# Altium PCB backup.PcbDoc (part 1 of 3)
Units mm, origin at the board's own origin, x right, y up, seen from the top; angles counter-clockwise.
Board outline 28.94 x 32.03 mm, 4 copper layers (Top Layer, Inner Layer 1, Inner Layer 2, Bottom Layer), stack 1.586 mm thick; 135 components, 83 nets, 442 pads, 355 vias.
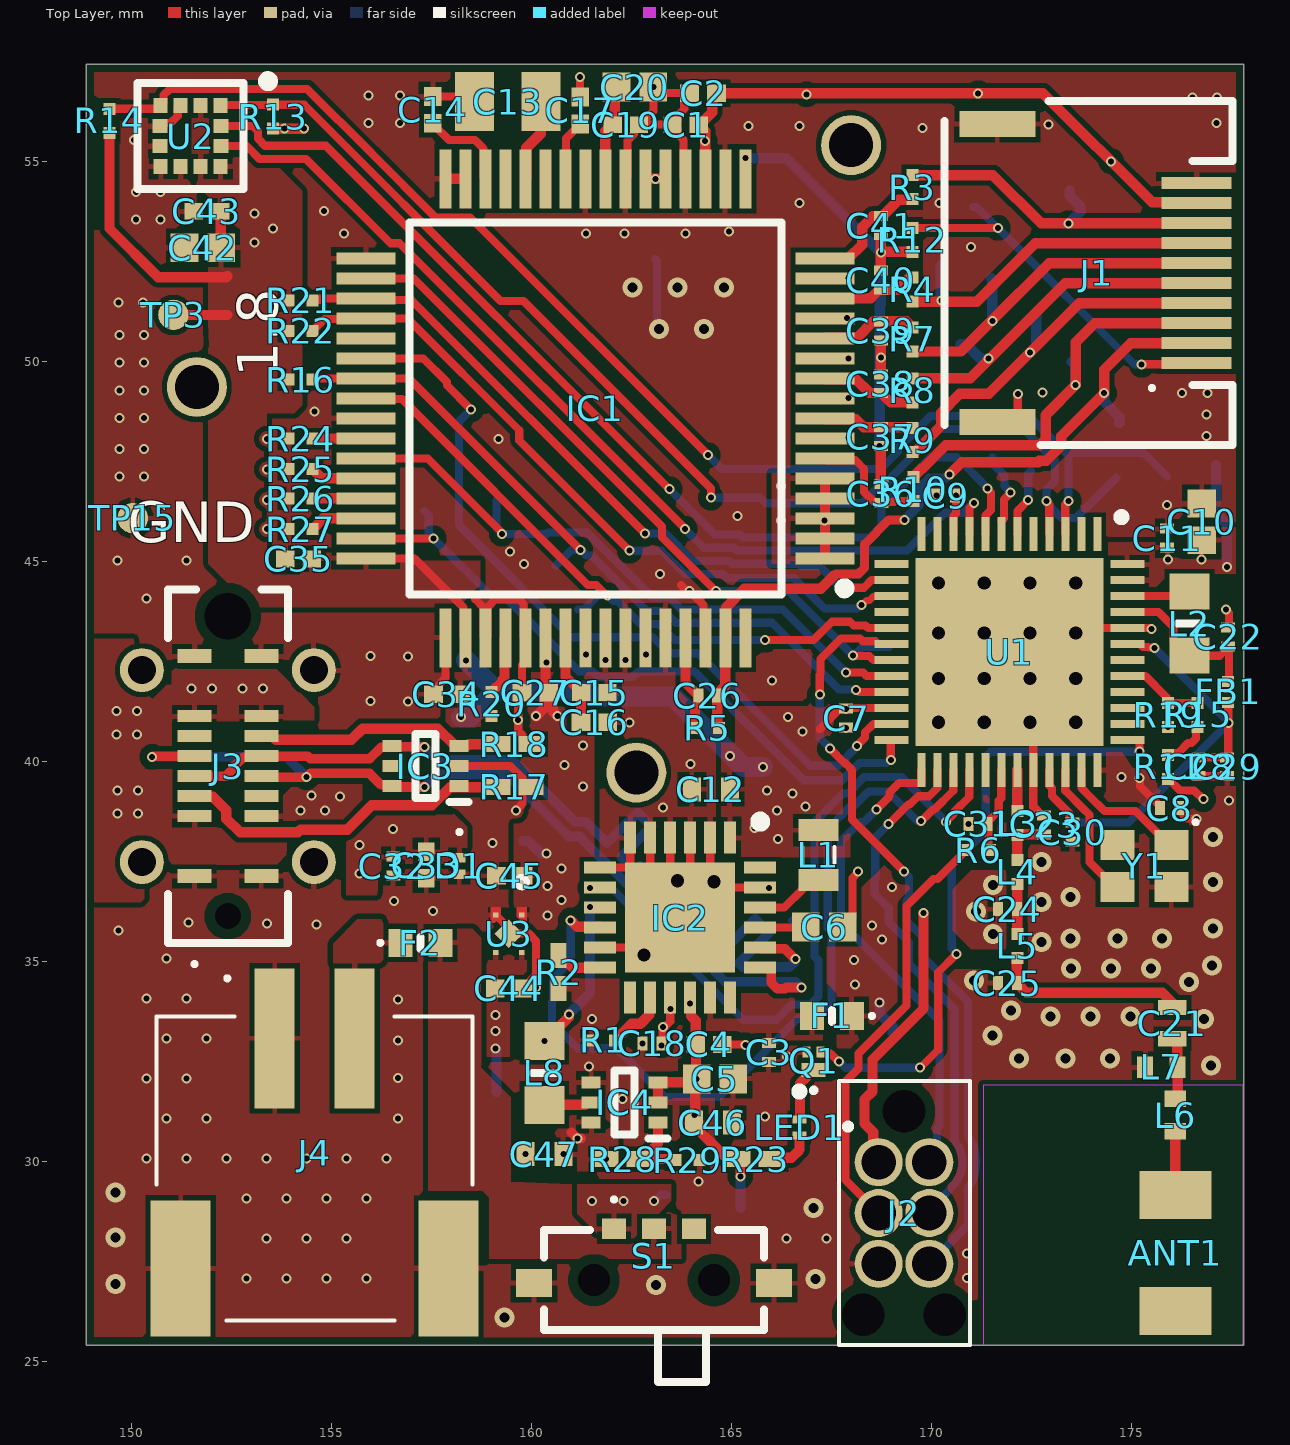
[diagram p0: Top Layer view]
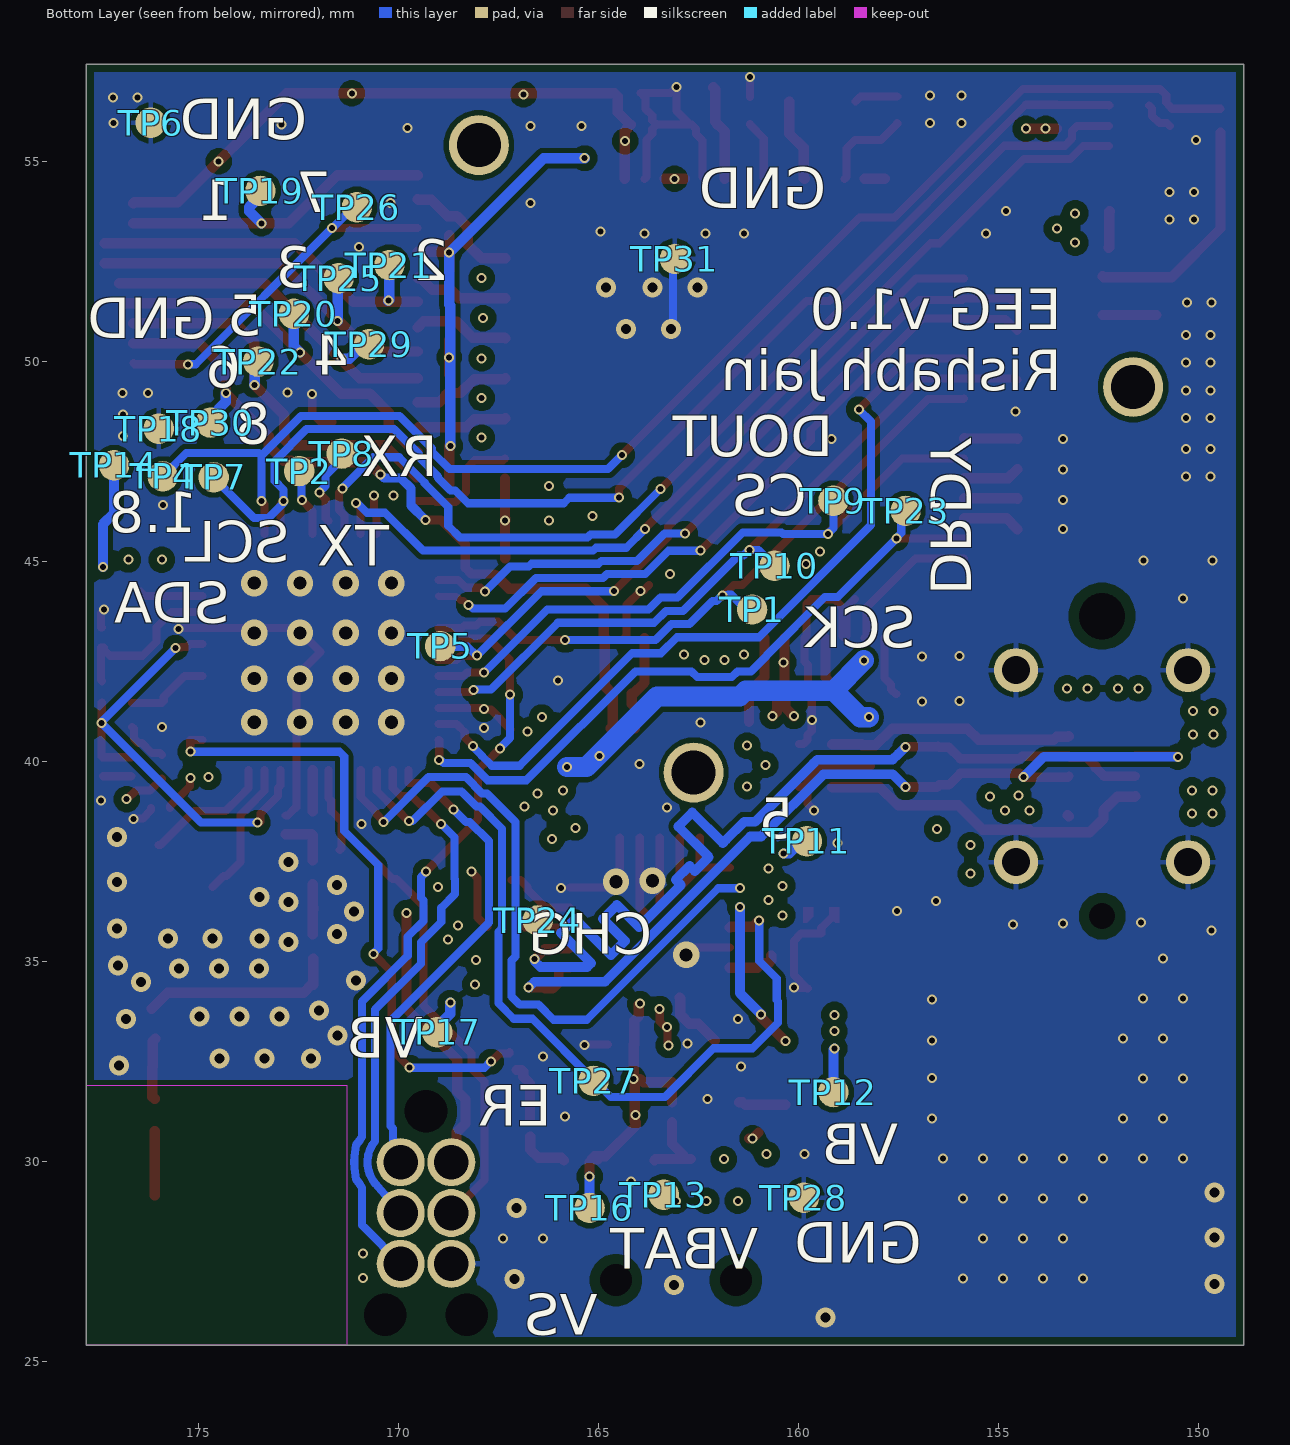
[diagram p1: Bottom Layer view, seen from below]
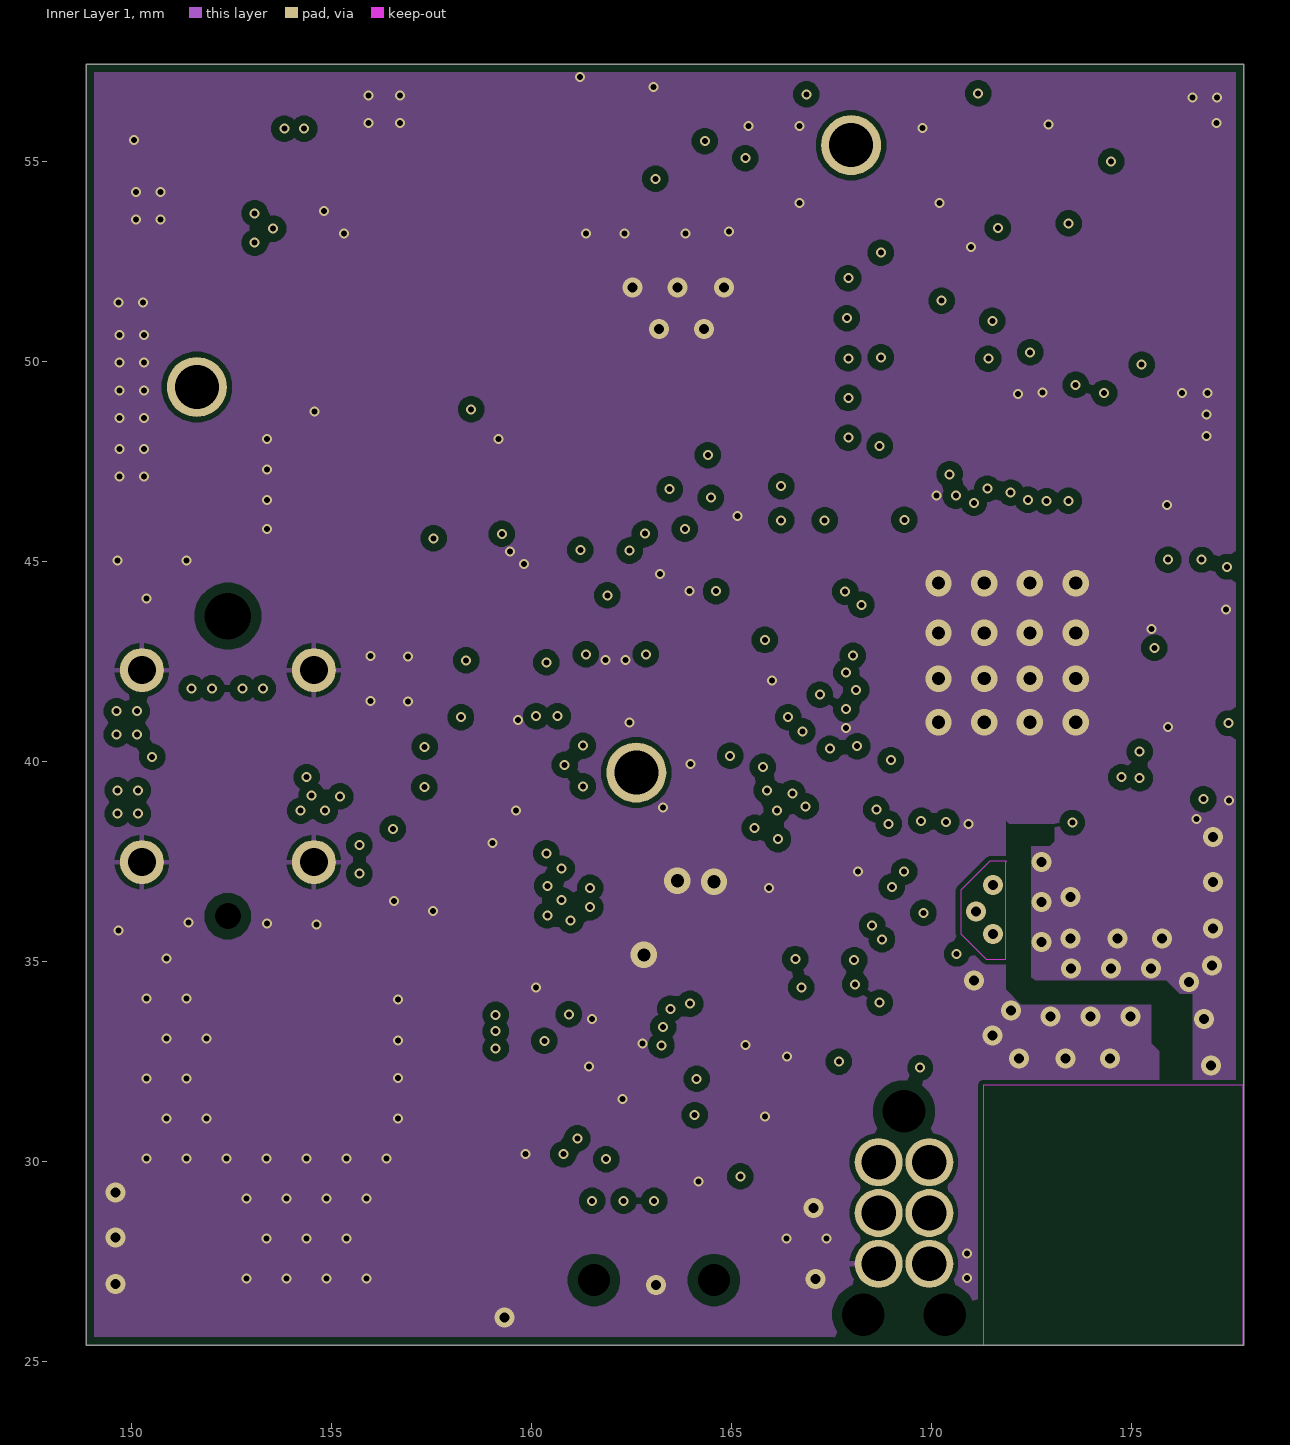
[diagram p2: Inner Layer 1]
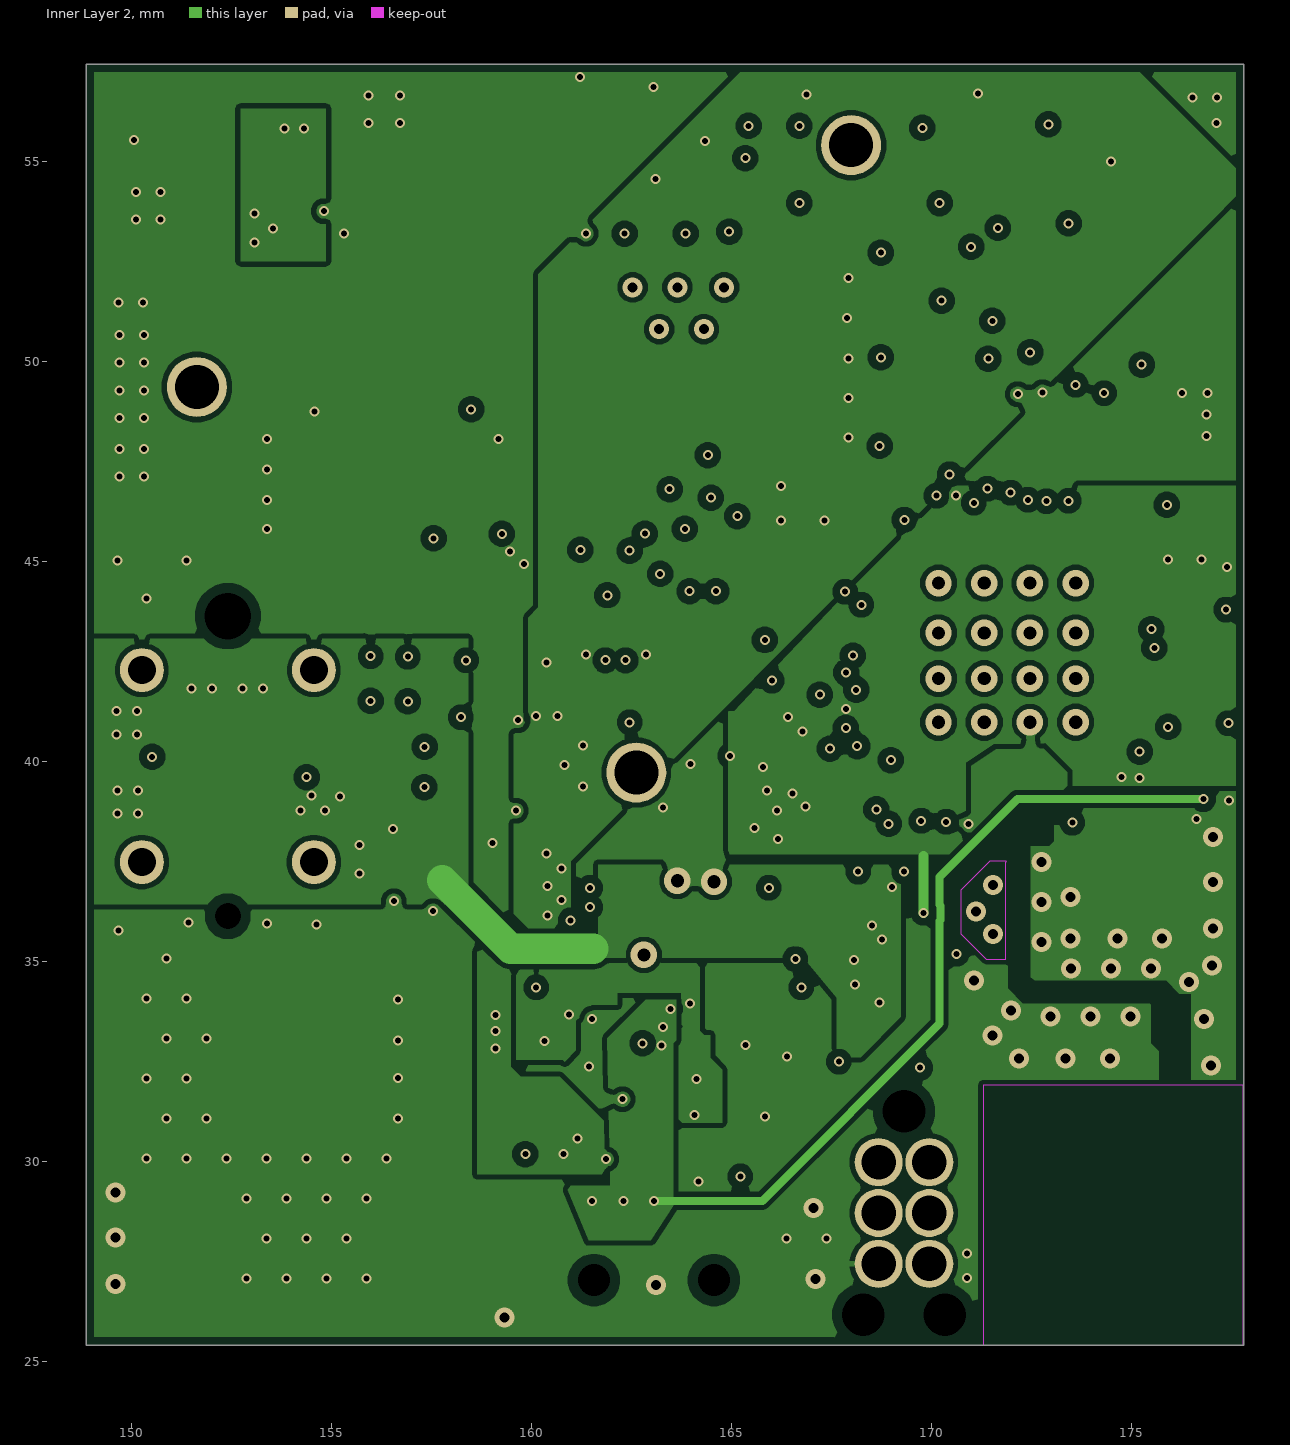
[diagram p3: Inner Layer 2]
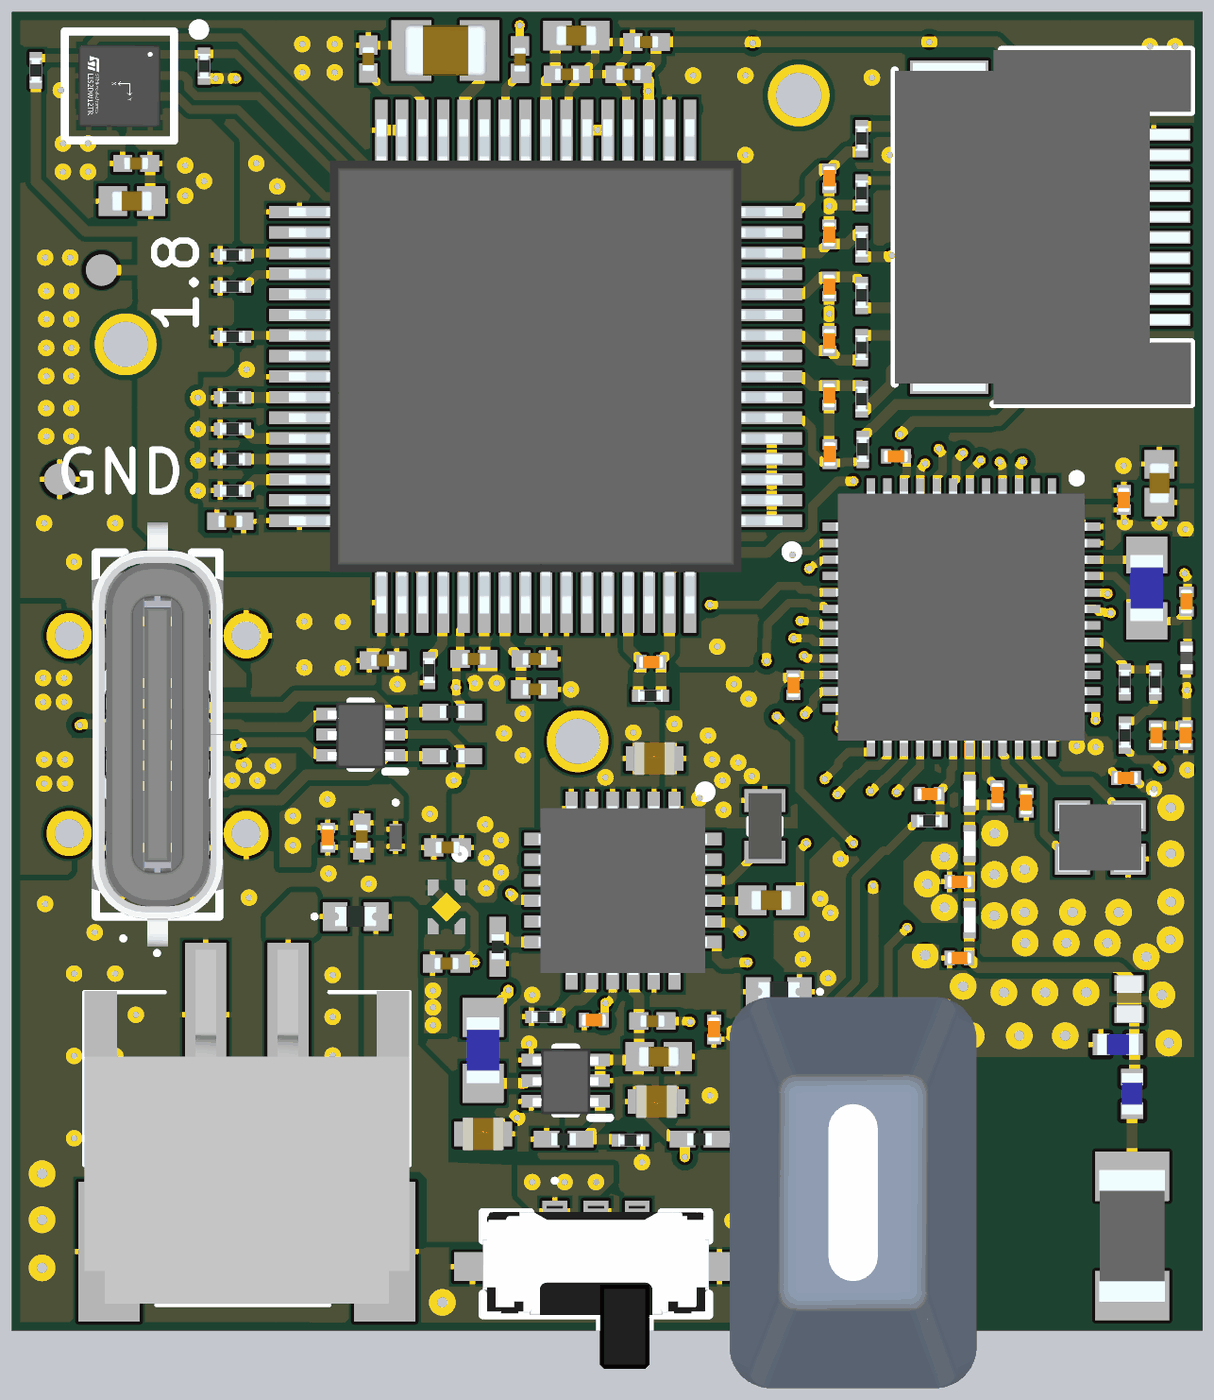
[diagram p5: 3D render of the assembled board from above, using the file's embedded part models]

## Layer stack, top to bottom
Top Solder: solder mask 0.0102, Solder Resist, Dk 3.8
Top Layer: signal copper 0.035
Dielectric 2: prepreg 0.2104, PP-006, Dk 4.4
Inner Layer 1: signal copper 0.0152
Dielectric 1: dielectric 1.065, FR-4, Dk 4.6
Inner Layer 2: signal copper 0.0152
Dielectric 3: prepreg 0.2104, PP-006, Dk 4.4
Bottom Layer: signal copper 0.035
Bottom Solder: solder mask 0.0102, Solder Resist, Dk 3.8

## Board outline
148.869,25.4 177.802,25.4 177.814,25.393 177.814,57.425 148.869,57.425

## Design rules (kind name [scope] priority, off if disabled: settings)
BoardOutlineClearance [All] p1: gap=0.2 ignorepadtopadclearanceinfootprint=FALSE
Clearance [All] p1: gap=0.127 ignorepadtopadclearanceinfootprint=FALSE except(0.25: Arc-Hole Track-Hole SMDPad-Hole THPad-Hole Via-Hole Fill-Hole Poly-Hole Region-Hole Text-Hole)
ComponentClearance [All] p1: gap=0.127 collisioncheckmode=3 verticalgap=0.127 showdistances=TRUE
DiffPairsRouting DiffPair_DiffPairsRouting [InDifferentialPair ('D')] p1: maxlimit=0.127 minlimit=0.127 mostfreqgap=0.127 toplayer_minwidth=0.24 toplayer_maxwidth=0.24 toplayer_prefwidth=0.24 midlayer1_minwidth=0.154 midlayer1_maxwidth=0.154 midlayer1_prefwidth=0.154 midlayer2_minwidth=0.154 midlayer2_maxwidth=0.154 midlayer2_prefwidth=0.154 bottomlayer_minwidth=0.24 bottomlayer_maxwidth=0.24 bottomlayer_prefwidth=0.24 impedanceprofiledriven=TRUE impedanceprofileid={78E9D437-D7EC-4C68-8FFD-46783BA93913} impedanceprofilevalue=90.000000 maxuncoupledlength=12.7
DiffPairsRouting DiffPairsRouting_1 [All] p2: maxlimit=0.254 minlimit=0.254 mostfreqgap=0.254 toplayer_minwidth=0.381 toplayer_maxwidth=0.381 toplayer_prefwidth=0.381 midlayer1_minwidth=0.381 midlayer1_maxwidth=0.381 midlayer1_prefwidth=0.381 midlayer2_minwidth=0.381 midlayer2_maxwidth=0.381 midlayer2_prefwidth=0.381 bottomlayer_minwidth=0.381 bottomlayer_maxwidth=0.381 bottomlayer_prefwidth=0.381 maxuncoupledlength=12.7
DiffPairsRouting [InDifferentialPairClass('All Differential Pairs')] p3: maxlimit=0.127 minlimit=0.127 mostfreqgap=0.127 toplayer_minwidth=0.24 toplayer_maxwidth=0.24 toplayer_prefwidth=0.24 midlayer1_minwidth=0.154 midlayer1_maxwidth=0.154 midlayer1_prefwidth=0.154 midlayer2_minwidth=0.154 midlayer2_maxwidth=0.154 midlayer2_prefwidth=0.154 bottomlayer_minwidth=0.24 bottomlayer_maxwidth=0.24 bottomlayer_prefwidth=0.24 impedanceprofiledriven=TRUE impedanceprofileid={78E9D437-D7EC-4C68-8FFD-46783BA93913} impedanceprofilevalue=90.000000 maxuncoupledlength=12.7
Height [All] p1: minheight=0 maxheight=1816.048 prefheight=12.7
HoleSize [All] p1: absolutevalues=TRUE maxlimit=6.3 minlimit=0.15 maxpercent=80.000 minpercent=20.000
HoleToHoleClearance [All] p1: gap=0.25 allowstackedmicrovias=FALSE
MatchedLengths DiffPair_MatchedLengths [InDifferentialPair ('D')] p1: tolerance=2.54 checknetsindiffpair=FALSE checkdiffpairvsdiffpair=TRUE checkxsignals=TRUE checkothers=TRUE
MinimumAnnularRing [All] p1: minimumring=0.05
MinimumSolderMaskSliver [All] p1: minsoldermaskwidth=0
PlaneClearance [All] p1: clearance=0.127
PlaneConnect PlaneConnectPowerPads [InPadClass('PowerPads')] p1: planeconnectstyle=Direct reliefexpansion=0.508 reliefentries=4 reliefconductorwidth=0.254 reliefairgap=0.254
PlaneConnect [All] p2: pad.planeconnectstyle=Relief pad.reliefexpansion=0.3 pad.reliefentries=4 pad.reliefconductorwidth=0.127 pad.reliefairgap=0.127 via.planeconnectstyle=Direct via.reliefexpansion=0.3 via.reliefentries=4 via.reliefconductorwidth=0.127 via.reliefairgap=0.127
PolygonConnect PolygonConnectPowerPads [All vs (InPadClass('PowerPads'))] p1: connectstyle=Direct reliefconductorwidth=0.254 reliefentries=4 polygonreliefangle="90 Angle" airgapwidth=0.254
PolygonConnect [All] p2: thpad.connectstyle=Relief thpad.reliefconductorwidth=0.127 thpad.reliefentries=4 thpad.polygonreliefangle="90 Angle" thpad.airgapwidth=0.127 smdpad.connectstyle=Relief smdpad.reliefconductorwidth=0.127 smdpad.reliefentries=4 smdpad.polygonreliefangle="90 Angle" smdpad.airgapwidth=0.127 via.connectstyle=Direct via.reliefconductorwidth=0.127 via.reliefentries=4 via.polygonreliefangle="90 Angle" via.airgapwidth=0.127
RoutingVias [All] p1: holewidth=0.15 width=0.25 viastyle="Through Hole" minholewidth=0.15 minwidth=0.25 maxholewidth=0.6 maxwidth=6.6
SilkToSilkClearance [All] p1: silktosilkclearance=0
SilkToSolderMaskClearance [IsPad] p1: minsilkscreentomaskgap=0.127 clearancetoexposedcopper=TRUE
SolderMaskExpansion [All] p1: expansion=0.075 istentingtop=FALSE
SupplyNets "Schematic Supply Nets_8" [InNet('VBAT')] p1: voltage=0.000
SupplyNets "Schematic Supply Nets_7" [InNet('+5V')] p2: voltage=0.000
SupplyNets "Schematic Supply Nets_6" [InNet('VBOOST')] p3: voltage=0.000
SupplyNets "Schematic Supply Nets_5" [InNet('VBAT_PRE')] p4: voltage=0.000
SupplyNets "Schematic Supply Nets_4" [InNet('GND')] p5: voltage=0.000
SupplyNets "Schematic Supply Nets_3" [InNet('+1.8V')] p6: voltage=0.000
SupplyNets "Schematic Supply Nets_2" [InNet('VBUS_PRE')] p7: voltage=0.000
SupplyNets "Schematic Supply Nets_1" [InNet('VSYS')] p8: voltage=0.000
SupplyNets "Schematic Supply Nets" [InNet('VBUS')] p9: voltage=0.000
Width Width_1 [All] p1: maxlimit=2.54 minlimit=0.089 preferedwidth=0.203 toplayer_minwidth=0.102 bottomlayer_minwidth=0.102 minimp=50.000000 maximp=50.000000 favimp=50.000000
Width [InNetClass('RF')] p2: maxlimit=0.262 minlimit=0.181 preferedwidth=0.262 toplayer_minwidth=0.262 midlayer1_maxwidth=0.181 midlayer1_prefwidth=0.181 midlayer2_maxwidth=0.181 midlayer2_prefwidth=0.181 bottomlayer_minwidth=0.262 impedanceprofiledriven=TRUE impedanceprofileid={72D798CF-88A4-4D94-A1B3-ABAB883C5A2B} impedanceprofilevalue=50.000000 minimp=50.000000 maximp=50.000000 favimp=50.000000
20 further rules are at their usual default settings.

## Classes and differential pairs
differential pair class USB: D
net class USB: D_N D_P
net class RF: NetANT1_1 NetC21_1 NetC23_2 NetC24_2 NetL3_1 RF
differential pair D: +D_P -D_N

## Components (designator, comment, footprint, x,y, rotation, side; value= is the part's Value field where it differs from the comment)
ANT1 "2450AT18B100" ANTC3216X140N 176.1,27.7 r270 top
C1 "GRM033R6YA104KE14D" CAPC0603X33N 163.861,55.91 r180 top
C2 "CL03A105MO3NRNH" CAPC0603X39N 164.293,56.698 r180 top
C3 "GRM035R61C225ME01D" GRM033D70J224ME01D 165.938,32.715 r270 top
C4 "GRM033R6YA104KE14D" CAPC0603X33N 164.44,32.918 r0 top
C5 "CL05A106MQ5NUNC" CAPC1005X70N 164.592,32.055 r0 top
C6 "CL05A106MQ5NUNC" CAPC1005X70N 167.325,35.85 r0 top
C7 "GRM033R6YA104KE14D" 0201_GENERIC_CAP 167.869,41.072 r270 top value=100nF
C8 "GRM033R6YA104KE14D" 0201_GENERIC_CAP 175.95,38.825 r0 top value=100nF
C9 "GRM033R6YA104KE14D" 0201_GENERIC_CAP 170.358,46.634 r180 top value=100nF
C10 "CL05A106MQ5NUNC" 0402_GENERIC_CAP 176.76,45.98 r270 top value=10µF
C11 "GRM033R6YA104KE14D" 0201_GENERIC_CAP 175.897,45.573 r90 top value=100nF
C12 "GRM158R61A226ME15D" GRM15X 164.49,39.294 r0 top
C13 "CL21A107MQYNNWE" CAPC2012X145N 159.41,56.49 r180 top
C14 "CL03A105MO3NRNH" CAPC0603X39N 157.536,56.28 r90 top
C15 "GRM033R6YA104KE14D" CAPC0603X33N 161.575,41.712 r0 top
C16 "CL03A105MO3NRNH" CAPC0603X39N 161.575,40.975 r0 top
C17 "CL03A105MO3NRNH" CAPC0603X39N 161.219,56.266 r90 top
C18 "GRM035R61C225ME01D" GRM033D70J224ME01D 163.017,32.944 r180 top
C19 "GRM033R6YA104KE14D" CAPC0603X33N 162.362,55.91 r0 top
C20 "CL05A106MQ5NUNC" CAPC1005X70N 162.591,56.85 r0 top
C21 "500R07S1R2BV4T" CAP_500R07S1R2BV4T_JOT 176.025,33.45 r90 top
C22 "GRM035R61C225ME01D" 0201_GENERIC_CAP 177.419,43.104 r270 top value=2.2µF
C23 "GJM0335C1E1R5WB01" 0201_GENERIC_CAP 172.822,38.405 r270 top value=1.5pF
C24 "GJM0335C1E2R0WB01" 0201_GENERIC_CAP 171.9,36.3 r0 top value=2.0pF
C25 "GJM0335C1HR30WB01D" 0201_GENERIC_CAP 171.9,34.45 r0 top value=0.3pF
C26 "GRM0335C1H102GE01D" GRM033D70J224ME01D 164.411,41.635 r180 top
C27 "CL03A105MO3NRNH" CAPC0603X39N 160.102,41.712 r180 top
C28 "GRM035R61C225ME01D" 0201_GENERIC_CAP 176.684,39.858 r90 top value=2.2µF
C29 "GRM033R70J103KA01D" 0201_GENERIC_CAP 177.395,39.858 r90 top value=10nF
C30 "GRM033R71A222KA01D" 0201_GENERIC_CAP 173.525,38.225 r90 top value=2.2nF
C31 "GRM0335C1H221FA01D" 0201_GENERIC_CAP 171.171,38.43 r0 top value=3.9pF
C32 "GRM035R61C225ME01D" GRM033D70J224ME01D 156.55,37.375 r270 top
C33 "GRM033R6YA104KE14D" CAPC0603X33N 157.375,37.4 r270 top
C34 "CL03A105MO3NRNH" CAPC0603X39N 157.892,41.675 r180 top
C35 "GRM033R6YA104KE14D" CAPC0603X33N 154.183,45.054 r180 top
C36 "GRM0335C1H221FA01D" GRM033D70J224ME01D 168.75,46.688 r270 top
C37 "GRM0335C1H221FA01D" GRM033D70J224ME01D 168.738,48.112 r90 top
C38 "GRM0335C1H221FA01D" GRM033D70J224ME01D 168.738,49.433 r270 top
C39 "GRM0335C1H221FA01D" GRM033D70J224ME01D 168.738,50.754 r90 top
C40 "GRM0335C1H221FA01D" GRM033D70J224ME01D 168.738,52.024 r270 top
C41 "GRM0335C1H221FA01D" GRM033D70J224ME01D 168.738,53.387 r90 top
C42 "CL05A106MQ5NUNC" CAPC1005X70N 151.79,52.832 r180 top
C43 "GRM033R6YA104KE14D" CAPC0603X33N 151.892,53.746 r180 top
C44 "CL03A105MO3NRNH" CAPC0603X39N 159.436,34.315 r0 top
C45 "CL03A105MO3NRNH" CAPC0603X39N 159.461,37.135 r180 top
C46 "GRM158R61A226ME15D" GRM15X 164.541,30.963 r180 top
C47 "GRM158R61A226ME15D" GRM15X 160.325,30.175 r0 top
D1 "ESDALC8-1BF4" ESDALC81BF4 158.2,37.375 r270 top
F1 "0402L050SL" 0402L010SLKR 167.513,33.63 r180 top
F2 "0402L050SL" 0402L010SLKR 157.226,35.458 r0 top
FB1 "BLM03AX121SN1D" BLM03AX121SN1D 177.419,41.732 r270 top value=120R/0.2A
IC1 "ADS1299IPAG" QFP50P1200X1200X120-64N 161.603,48.818 r180 top
IC2 "NPM1100-QDAA-R7" QFN50P400X400X90-25N-D 163.723,36.087 r270 top
IC3 "TPD4E1B06DRLR" SOTFL50P160X60-6N 157.35,39.875 r180 top
IC4 "TPS61023DRLR" SOTFL50P160X60-6N 162.331,31.471 r180 top
J1 "10FHH-SM1-GAN-TF_LF__SN_" 10FHHSM1GANTFLFSN 173.93,52.2 r90 top
J2 "TC2030-MCP" TC2030MCP 168.681,29.972 r270 top
J3 "GT-USB-7055BB" GTUSB7055BB 152.415,39.875 r90 top
J4 "S2B-PH-SM4-TB_LF__SN_" S2BPHSM4TBLFSN 154.584,29.82 r180 top
L1 "MBKK1608T2R2M" MBKK1608T1R0M 167.175,37.65 r270 top
L2 "MLZ1608M4R7WT000" MLZ1608M4R7WT000 176.454,43.434 r270 top value=4.7µH
L3 "LQP03HQ2N7B02" LQP03HQ2N7B02 172.15,38.45 r270 top value=2.7nH
L4 "LQP03HQ3N5B02" LQP03HQ2N7B02 172.15,37.225 r270 top value=3.5nH
L5 "LQP03HQ3N5B02" LQP03HQ2N7B02 172.15,35.375 r270 top value=3.5nH
L6 "L-07C3N3SV6T" INDC1005X60N 176.1,31.15 r270 top
L7 "L-07C2N7SV6T" INDC1005X60N 175.75,32.35 r0 top
L8 "DFE18SAN1R0MG0L" INDC1608X100N 160.325,32.207 r90 top
LED1 "APG0603SEC-E-TT" APG0603SECETT 166.7,30.839 r270 top
Q1 "DMN31D5UFZ-7B" X2-DFN0606-3 167.056,32.436 r270 top
R1 "ERA1AEB103C" ERA1A_(0201) 161.798,33.02 r0 top
R2 "RC0201FR-071K8L" RESC0603X26N 160.68,34.722 r270 top
R3 "ERA1AEB103C" ERA1A_(0201) 169.525,54.35 r270 top
R4 "ERA1AEB103C" ERA1A_(0201) 169.525,51.785 r90 top
R5 "AF0201JR-071ML" ERA1A_(0201) 164.394,40.823 r0 top
R6 "RC0201FR-071K8L" 0201_GENERIC_RES 171.172,37.776 r180 top value=1k
R7 "ERA1AEB103C" ERA1A_(0201) 169.525,50.54 r90 top
R8 "ERA1AEB103C" ERA1A_(0201) 169.525,49.27 r270 top
R9 "ERA1AEB103C" ERA1A_(0201) 169.525,48.025 r90 top
R10 "ERA1AEB103C" ERA1A_(0201) 169.55,46.8 r270 top
R11 "AF0201JR-071ML" ERA1A_(0201) 175.922,39.858 r270 top
R12 "ERA1AEB103C" ERA1A_(0201) 169.525,53.029 r270 top
R13 "ERA1AEB103C" ERA1A_(0201) 153.543,56.109 r270 top
R14 "ERA1AEB103C" ERA1A_(0201) 149.454,56.007 r270 top
R15 "AF0201JR-071ML" ERA1A_(0201) 176.659,41.154 r270 top
R16 "ERA1AEB103C" ERA1A_(0201) 154.234,49.535 r180 top
R17 "RC0201JR-075K1L" RESC0603X26N 159.575,39.35 r0 top
R18 "RC0201JR-075K1L" RESC0603X26N 159.575,40.425 r0 top
R19 "AF0201JR-071ML" ERA1A_(0201) 175.922,41.154 r90 top
R20 "ERA1AEB103C" ERA1A_(0201) 159.009,41.432 r270 top
R21 "ERA1AEB103C" ERA1A_(0201) 154.234,51.516 r180 top
R22 "ERA1AEB103C" ERA1A_(0201) 154.234,50.754 r180 top
R23 "RC0201JR-07680RL" RESC0603X26N 165.583,30.048 r180 top
R24 "ERA1AEB103C" ERA1A_(0201) 154.234,48.062 r0 top
R25 "ERA1AEB103C" ERA1A_(0201) 154.234,47.3 r0 top
R26 "ERA1AEB103C" ERA1A_(0201) 154.234,46.563 r0 top
R27 "ERA1AEB103C" ERA1A_(0201) 154.234,45.801 r0 top
R28 "AC0201FR-0776K8L" RESC0603X26N 162.281,30.048 r180 top
R29 "ERA1AEB103C" ERA1A_(0201) 163.906,30.023 r0 top
S1 "MK-11C04-G013" MK11C04G013 163.067,26.391 r0 top
TP1 "TP" TP#1 161.163,43.79 r90 bottom
TP2 "TP" TP#2 172.486,47.251 r90 top
TP3 "TP" TP#1 151.054,51.156 r90 top
TP4 "TP" TP#2 175.895,47.117 r90 top
TP5 "TP" TP#1 168.961,42.875 r90 bottom
TP6 "TP" TP#1 176.2,55.956 r90 bottom
TP7 "TP" TP#2 174.625,47.092 r90 top
TP8 "TP" TP#1 171.425,47.688 r90 bottom
TP9 "TP" TP#1 159.131,46.507 r90 bottom
TP10 "TP" TP#1 160.603,44.882 r90 bottom
TP11 "TP" TP#1 159.791,37.998 r90 bottom
TP12 "TP" TP#1 159.131,31.725 r90 bottom
TP13 "TP" TP#1 163.373,29.159 r90 bottom
TP14 "TP" TP#1 177.114,47.396 r90 bottom
TP15 "TP" TP#1 150.038,46.076 r90 top
TP16 "TP" TP#1 165.227,28.829 r90 bottom
TP17 "TP" TP#1 169.037,33.223 r90 bottom
TP18 "TP" TP#1 175.997,48.311 r90 bottom
TP19 "TP" TP#1 173.457,54.254 r90 bottom
TP20 "TP" TP#1 172.618,51.181 r90 bottom
TP21 "TP" TP#1 170.231,52.4 r90 bottom
TP22 "TP" TP#1 173.507,49.987 r90 bottom
TP23 "TP" TP#1 157.328,46.253 r90 bottom
TP24 "TP" TP#1 166.522,36.017 r90 bottom
TP25 "TP" TP#1 171.501,52.07 r90 bottom
TP26 "TP" TP#1 171.044,53.848 r90 bottom
TP27 "TP" TP#1 165.125,32.004 r90 bottom
TP28 "TP" TP#1 159.868,29.083 r90 bottom
TP29 "TP" TP#1 170.739,50.419 r90 bottom
TP30 "TP" TP#1 174.701,48.463 r90 bottom
TP31 "TP" TP#1 163.093,52.553 r90 bottom
U1 "nRF54L15-QFAA" "NRF54L15 CUSTOM" 171.95,42.725 r270 top
U2 "LIS2DW12TR" FP-LGA12-DM00170568-MFG 151.486,55.626 r270 top
U3 "NCP163AMX500TBG" XDFN4_711AJ_ONS 159.436,35.687 r270 top
Y1 "ECS-320-8-37B2-CTN-TR" ECS320837B2CTNTR 175.325,37.375 r180 top

## Footprints (in the part's own frame and the unit in brackets; to place one, negate y for a bottom-side part, rotate by r counter-clockwise, add the part's x,y. Pads: shape width x height; smd on the part's side, far side on the other; paste and mask are expansions set on the pad)
10FHHSM1GANTFLFSN [mm]
  rect 0.3x1.76 smd: 1(-2.25,-2.7) 2(-1.75,-2.7) 3(-1.25,-2.7) 4(-0.75,-2.7) 5(-0.25,-2.7) 6(0.25,-2.7) 7(0.75,-2.7) 8(1.25,-2.7) 9(1.75,-2.7) 10(2.25,-2.7)
  rect 0.65x1.9 smd: 11(-3.725,2.28) 12(3.725,2.28)
  silkscreen extent -4.3,-3.6 4.3,3.6, body extent -4.3,-3.6 4.3,3.6, height 2.1
0201_GENERIC_CAP [mm]
  rect 0.25x0.35 smd: 1(-0.237,0) 2(0.237,0)
  body extent -0.3,-0.15 0.3,0.15, height 0.3
0201_GENERIC_RES [mm]
  rect 0.3x0.3 smd: 1(-0.3,0) 2(0.3,0)
  body extent -0.3,-0.15 0.3,0.15, height 0.23
0402_GENERIC_CAP [mm]
  rect 0.69x0.72 smd: 1(-0.46,0) 2(0.46,0)
  body extent -0.5,-0.25 0.5,0.25, height 0.7
0402L010SLKR [mm]
  rect 0.6x0.7 smd: 1(-0.5,0) 2(0.5,0)
  silkscreen extent -1.05,-0.15 0,0.15, body extent -0.5,-0.25 0.5,0.25, height 0.6
ANTC3216X140N [mm]
  rect 1.2x1.8 smd: 1(-1.45,0) 2(1.45,0)
  body extent -1.6,-0.8 1.6,0.8, height 1.4
APG0603SECETT [mm]
  rect 0.2x0.35 smd: 1(-0.2,0) 2(0.2,0)
  silkscreen extent -1,-0.1 -0.8,0.1, body extent -0.32,-0.18 0.33,0.17, height 0.2
BLM03AX121SN1D [mm]
  rect 0.275x0.3 smd: 1(-0.263,0) 2(0.263,0)
  silkscreen extent 0,-0.1 0,0.1, body extent -0.3,-0.15 0.3,0.15, height 0.3
CAP_500R07S1R2BV4T_JOT [mil]
  rect 15x28 smd paste+0: 1(-15.44,0) 2(15.44,0)
  body extent -22,-12 22,12, height 24
CAPC0603X33N [mm]
  rect 0.46x0.42 smd: 1(-0.33,0) 2(0.33,0)
  body extent -0.3,-0.15 0.3,0.15, height 0.33
CAPC0603X39N [mm]
  rect 0.47x0.44 smd: 1(-0.335,0) 2(0.335,0)
  body extent -0.3,-0.15 0.3,0.15, height 0.39
CAPC1005X70N [mm]
  rect 0.69x0.72 smd: 1(-0.46,0) 2(0.46,0)
  body extent -0.5,-0.25 0.5,0.25, height 0.7
CAPC2012X145N [mm]
  rect 0.97x1.47 smd: 1(-0.83,0) 2(0.83,0)
  body extent -1,-0.63 1,0.63, height 1.45
ECS320837B2CTNTR [mm]
  rect 0.85x0.75 smd: 1(-0.675,-0.525) 2(0.675,-0.525) 3(0.675,0.525) 4(-0.675,0.525)
  silkscreen extent -1.33,-1.15 -1.23,-1.05, body extent -1.02,-0.82 1.02,0.82, height 0.6
ERA1A_(0201) [mm]
  rect 0.3x0.3 smd: 1(-0.3,0) 2(0.3,0)
  body extent -0.3,-0.15 0.3,0.15, height 0.23
ESDALC81BF4 [mm]
  rect 0.243x0.3 smd: 1(-0.207,0) 2(0.207,0)
  silkscreen extent -0.9,-0.05 -0.8,0.05, body extent -0.3,-0.15 0.3,0.15, height 0.42
FP-LGA12-DM00170568-MFG [mm]
  rect 0.375x0.35 smd paste+0 mask+0: 1(-0.763,0.75) 2(-0.763,0.25) 3(-0.763,-0.25) 4(-0.763,-0.75) 7(0.763,-0.75) 8(0.763,-0.25) 9(0.763,0.25) 10(0.763,0.75)
  rect 0.35x0.375 smd paste+0 mask+0: 5(-0.25,-0.763) 6(0.25,-0.763) 11(0.25,0.763) 12(-0.25,0.763)
  silkscreen extent -1.5,-1.33 1.33,2.06, body extent -1.55,-1.55 1.55,1.55, height 0.25
GRM15X [mm]
  rect 0.45x0.6 smd: 1(-0.475,0) 2(0.475,0)
  body extent -0.5,-0.4 0.5,0.4, height 0.5
GRM033D70J224ME01D [mm]
  rect 0.25x0.35 smd: 1(-0.237,0) 2(0.237,0)
  body extent -0.3,-0.15 0.3,0.15, height 0.3
GTUSB7055BB [mm]
  rect 0.35x0.85 smd: A1(-2.75,0.835) A12(2.75,0.835) B1(2.75,-0.835) B12(-2.75,-0.835)
  rect 0.3x0.85 smd: A4(-1.25,0.835) A5(-0.75,0.835) A6(-0.25,0.835) A7(0.25,0.835) A8(0.75,0.835) A9(1.25,0.835) B4(1.25,-0.835) B5(0.75,-0.835) B6(0.25,-0.835) B7(-0.25,-0.835) B8(-0.75,-0.835) B9(-1.25,-0.835)
  round 0.325 hole 0.65 unplated: MH1(-3.75,0)
  round 0.58 hole 1.16 unplated: MH2(3.75,0)
  round 1.1 hole 0.7: S1(-2.4,2.15) S2(2.4,2.15) S3(2.4,-2.15) S4(-2.4,-2.15)
  silkscreen extent -5,-1.5 4.42,1.5, body extent -5.15,-1.6 5.15,1.6, height 6.5
INDC1005X60N [mil]
  rect 16x21 smd mask+4: 1(-16,0) 2(16,0)
  body extent -20,-10 20,10, height 24
INDC1608X100N [mm]
  rect 0.95x1 smd: 1(-0.8,0) 2(0.8,0)
  silkscreen extent 0,-0.3 0,0.3, body extent -0.8,-0.4 0.8,0.4, height 1
LQP03HQ2N7B02 [mm]
  rect 0.3x0.3 smd: 1(-0.3,0) 2(0.3,0)
  body extent -0.3,-0.15 0.3,0.15, height 0.42
MBKK1608T1R0M [mm]
  rect 0.55x1 smd: 1(-0.625,0) 2(0.625,0)
  silkscreen extent -0.2,-0.4 0.2,0.4, body extent -0.8,-0.4 0.8,0.4, height 1
MK11C04G013 [mm]
  rect 0.6x0.51 smd: 1(-1,1.915) 2(1,1.915) 3(0,1.915)
  rect 0.9x0.7 smd: 4(-3,0.56) 5(3,0.56)
  round 0.4 hole 0.8 unplated: 6(-1.5,0.635) 7(1.5,0.635)
  silkscreen extent -2.75,-1.91 2.75,2.7, body extent -3.25,-1.91 3.25,2.04, height 0.34
MLZ1608M4R7WT000 [mm]
  rect 0.9x1 smd: 1(-0.8,0) 2(0.8,0)
  silkscreen extent 0,-0.3 0,0.3, body extent -0.8,-0.4 0.8,0.4, height 0.95
"NRF54L15 CUSTOM" [mm]
  rect 0.85x0.2 smd: 1(-2.95,2.2) 2(-2.95,1.8) 3(-2.95,1.4) 4(-2.95,1) 5(-2.95,0.6) 6(-2.95,0.2) 7(-2.95,-0.2) 8(-2.95,-0.6) 9(-2.95,-1) 10(-2.95,-1.4) 11(-2.95,-1.8) 12(-2.95,-2.2) 25(2.95,-2.2) 26(2.95,-1.8) 27(2.95,-1.4) 28(2.95,-1) 29(2.95,-0.6) 30(2.95,-0.2) 31(2.95,0.2) 32(2.95,0.6) 33(2.95,1) 34(2.95,1.4) 35(2.95,1.8) 36(2.95,2.2)
  rect 0.2x0.85 smd: 13(-2.2,-2.95) 14(-1.8,-2.95) 15(-1.4,-2.95) 16(-1,-2.95) 17(-0.6,-2.95) 18(-0.2,-2.95) 19(0.2,-2.95) 20(0.6,-2.95) 21(1,-2.95) 22(1.4,-2.95) 23(1.8,-2.95) 24(2.2,-2.95) 37(2.2,2.95) 38(1.8,2.95) 39(1.4,2.95) 40(1,2.95) 41(0.6,2.95) 42(0.2,2.95) 43(-0.2,2.95) 44(-0.6,2.95) 45(-1,2.95) 46(-1.4,2.95) 47(-1.8,2.95) 48(-2.2,2.95)
  rect 4.7x4.7 smd: 49(0,0)
  silkscreen extent -3.47,2.7 -3.28,2.9, body extent -3.05,-3.05 3.05,3.05, height 0.95
QFN50P400X400X90-25N-D [mm]
  rect 0.8x0.3 smd: 1(-2,1.25) 2(-2,0.75) 3(-2,0.25) 4(-2,-0.25) 5(-2,-0.75) 6(-2,-1.25) 13(2,-1.25) 14(2,-0.75) 15(2,-0.25) 16(2,0.25) 17(2,0.75) 18(2,1.25)
  rect 0.3x0.8 smd: 7(-1.25,-2) 8(-0.75,-2) 9(-0.25,-2) 10(0.25,-2) 11(0.75,-2) 12(1.25,-2) 19(1.25,2) 20(0.75,2) 21(0.25,2) 22(-0.25,2) 23(-0.75,2) 24(-1.25,2)
  rect 2.75x2.75 smd: 25(0,0)
  silkscreen extent -2.52,1.88 -2.28,2.13, body extent -2.05,-2.05 2.05,2.05, height 0.9
QFP50P1200X1200X120-64N [mm]
  rect 1.475x0.3 smd: 1(-5.738,3.75) 2(-5.738,3.25) 3(-5.738,2.75) 4(-5.738,2.25) 5(-5.738,1.75) 6(-5.738,1.25) 7(-5.738,0.75) 8(-5.738,0.25) 9(-5.738,-0.25) 10(-5.738,-0.75) 11(-5.738,-1.25) 12(-5.738,-1.75) 13(-5.738,-2.25) 14(-5.738,-2.75) 15(-5.738,-3.25) 16(-5.738,-3.75) 33(5.738,-3.75) 34(5.738,-3.25) 35(5.738,-2.75) 36(5.738,-2.25) 37(5.738,-1.75) 38(5.738,-1.25) 39(5.738,-0.75) 40(5.738,-0.25) 41(5.738,0.25) 42(5.738,0.75) 43(5.738,1.25) 44(5.738,1.75) 45(5.738,2.25) 46(5.738,2.75) 47(5.738,3.25) 48(5.738,3.75)
  rect 0.3x1.475 smd: 17(-3.75,-5.738) 18(-3.25,-5.738) 19(-2.75,-5.738) 20(-2.25,-5.738) 21(-1.75,-5.738) 22(-1.25,-5.738) 23(-0.75,-5.738) 24(-0.25,-5.738) 25(0.25,-5.738) 26(0.75,-5.738) 27(1.25,-5.738) 28(1.75,-5.738) 29(2.25,-5.738) 30(2.75,-5.738) 31(3.25,-5.738) 32(3.75,-5.738) 49(3.75,5.738) 50(3.25,5.738) 51(2.75,5.738) 52(2.25,5.738) 53(1.75,5.738) 54(1.25,5.738) 55(0.75,5.738) 56(0.25,5.738) 57(-0.25,5.738) 58(-0.75,5.738) 59(-1.25,5.738) 60(-1.75,5.738) 61(-2.25,5.738) 62(-2.75,5.738) 63(-3.25,5.738) 64(-3.75,5.738)
  silkscreen extent -6.35,-4.65 4.65,4.65, body extent -6,-6 6,6, height 1.2
RESC0603X26N [mm]
  rect 0.625x0.4 smd: 1(-0.412,0) 2(0.412,0)
  body extent -0.3,-0.15 0.3,0.15, height 0.26
S2BPHSM4TBLFSN [mm]
  rect 1x3.5 smd: 1(1,-3.25) 2(-1,-3.25)
  rect 1.5x3.4 smd: MP1(3.35,2.5) MP2(-3.35,2.5)
  silkscreen extent -3.95,-4.8 3.95,3.8, body extent -3.95,-4.83 3.95,3.77, height 5.6
SOTFL50P160X60-6N [mm]
  rect 0.475x0.3 smd: 1(-0.838,0.5) 2(-0.838,0) 3(-0.838,-0.5) 4(0.838,-0.5) 5(0.838,0) 6(0.838,0.5)
  silkscreen extent -1.07,-0.8 0.25,0.9, body extent -0.8,-0.78 0.8,0.82, height 0.6
TC2030MCP [mm]
  round 1.2 hole 0.863: 1(0,0) 2(0,1.27) 3(1.27,0) 4(1.27,1.27) 5(2.54,0) 6(2.54,1.27)
  round 0.533 hole 1.067 unplated: MH1(-1.27,0.635) MH2(3.81,1.651) MH3(3.81,-0.381)
  silkscreen extent -2.03,-0.99 4.57,2.29, body extent -3.53,-2.36 5.97,3.63, height 39.8
TP#1 [mil]
  round 30 smd mask+4: 1(0,0)
TP#2 [mil]
  round 30 smd far side mask+4: 1(0,0)
X2-DFN0606-3 [mm]
  rect 0.35x0.6 smd: 1(0.155,0)
  rect 0.28x0.2 smd: 2(-0.29,0.175) 3(-0.29,-0.175)
  silkscreen extent 0.65,-0.01 0.68,0.02, body extent -0.31,-0.31 0.31,0.31, height 0.41
XDFN4_711AJ_ONS [mil]
  rect 5x5 smd paste-2.5 mask-2.5: 1(-18.5,12.8) 2(-18.5,-12.8) 3(18.5,-12.8) 4(18.5,12.8)
  rect 20x20 smd rot 45 paste-10 mask+0: 5(0,0)
  Top Layer region: -10.83,-17.91 -26.18,-17.91 -26.18,-7.68 -16.73,-7.68 -10.83,-13.58
  Top Layer region: -10.83,17.91 -26.18,17.91 -26.18,7.68 -16.73,7.68 -10.83,13.58
  Top Layer region: 0,-10 0,-10 0,-10 0,-10 0,-10 0,-10 0,-10 0,-10
  Top Layer region: 0,10 0,10 0,10 0,10 0,10 0,10 0,10 0,10
  silkscreen extent -56,8 -46,18

## Part data
ANT1: library part 2450AT18B0100001E, "Antenna", Manufacturer_Name="JOHANSON TECHNOLOGY", Datasheet Link=https://www.johansontechnology.com/docs/3829/Antenna-2450AT18B0100001E-Rev5.0_uMmswfC.pdf, Height=1.4mm, Manufacturer_Part_Number=2450AT18B0100001E
C1 C4 C15 C19 C33 C35 C43: "Capacitor 0.1uF 0201", Manufacturer_Name="Murata Electronics", Mouser Part Number=81-GRM33R6YA104KE14D, Arrow Part Number=GRM033R6YA104KE14D, Arrow Price/Stock=https://www.arrow.com/en/products/grm033r6ya104ke14d/murata-manufacturing?utm_currency=USD&region=europe, Datasheet Link=https://search.murata.co.jp/Ceramy/image/img/A01X/G101/ENG/GRM033R6YA104KE14-01A.pdf, Height=0.33mm, Manufacturer_Part_Number=GRM033R6YA104KE14D, Mouser Price/Stock=https://www.mouser.co.uk/ProductDetail/Murata-Electronics/GRM033R6YA104KE14D?qs=P%2FC4Eoq9CDwTt3wOuyKhXw%3D%3D
C2 C14 C16 C17 C27 C34 C44 C45: "Capacitor 1uF 0201", Manufacturer_Name=SAMSUNG, Mouser Part Number=187-CL03A105MO3NRNH, Arrow Part Number=CL03A105MO3NRNH, Arrow Price/Stock=https://www.arrow.com/en/products/cl03a105mo3nrnh/samsung-electro-mechanics?region=europe, Datasheet Link=https://static6.arrow.com/aropdfconversion/5520c68c9128c972ec6f0cbf09912ac8e6a87451/cl03a105mo3nrnh.pdf, Height=0.39mm, Manufacturer_Part_Number=CL03A105MO3NRNH, Mouser Price/Stock=https://www.mouser.co.uk/ProductDetail/Samsung-Electro-Mechanics/CL03A105MO3NRNH?qs=%252B6g0mu59x7LEwOOdfYkIjw%3D%3D
C3 C18 C32: "Capacitor 2.2uF 0201", Manufacturer_Name="Murata Electronics", Mouser Part Number=81-GRM035R61C225ME1D, Datasheet Link=https://search.murata.co.jp/Ceramy/image/img/A01X/G101/ENG/GRM035R61C225ME01-01A.pdf, Height=0.33mm, Manufacturer_Part_Number=GRM035R61C225ME01D, Mouser Price/Stock=https://www.mouser.co.uk/ProductDetail/Murata-Electronics/GRM035R61C225ME01D?qs=DPoM0jnrROXTliYh3Jmu1A%3D%3D
C5 C6 C20 C42: "Capacitor 10uF 0402 6.3V", Manufacturer_Name=SAMSUNG, Mouser Part Number=187-CL05A106MQ5NUNC, Arrow Part Number=CL05A106MQ5NUNC, Arrow Price/Stock=https://www.arrow.com/en/products/cl05a106mq5nunc/samsung-electro-mechanics.html?utm_currency=USD&region=europe, Datasheet Link=https://datasheet.datasheetarchive.com/originals/distributors/Datasheets-DGA10/2406160.pdf, Height=0.7mm, Manufacturer_Part_Number=CL05A106MQ5NUNC, Mouser Price/Stock=https://www.mouser.co.uk/ProductDetail/Samsung-Electro-Mechanics/CL05A106MQ5NUNC?qs=X6jEic%2FHinDK8vVLi1zwpw%3D%3D
C7 C8 C9: library part C0201-100n-10V-X7R, "Capacitor, X7R, ±10%", Manufacturer=N.A., Part number NEMS=100200469, Artikkelnr Noca=N.A., Author=getr, Component Class=Capacitors, Component Status=Active, ComponentLink1Description=Datasheet, ComponentLink1URL=N.A., ComponentLink2Description="Supplier link", ComponentLink2URL=N.A., HelpURL=N.A., LatestRevisionDate=2021-04-12, Manufacturer Part Number=N.A., Note=10V, Pad Count=2, Part Number=C0201-100n-10V-X7R, Part number IPS=N.A., Part number Norautron=N.A., PartId=100200469, Published=2021-04-12, Supplier 1=N.A., Supplier 2=N.A., Supplier Part Number 1=N.A., Supplier Part Number 2=N.A.
C10: library part C0402-10µF-6.3V-X6S, "Capacitor 10uF 0402 6.3V", Manufacturer=N.A., Part number NEMS=100200478, Artikkelnr Noca=N.A., Author=getr, Component Class=Capacitors, Component Status=Active, ComponentLink1Description=Datasheet, ComponentLink1URL=N.A., ComponentLink2Description="Supplier link", ComponentLink2URL=N.A., Footprint Doc=0402, HelpURL=N.A., LatestRevisionDate=2021-06-25, Manufacturer Part Number=N.A., Note=6.3V, Pad Count=2, Part Number=C0402-10µF-6.3V-X6S, Part number IPS=N.A., Part number Norautron=N.A., PartId=100200478, Published=2021-06-25, Supplier 1=N.A., Supplier 2=N.A., Supplier Part Number 1=N.A., Supplier Part Number 2=N.A.
C11: library part C0201-100n-10V-X7R, "Capacitor, X7R, ±10% 0201", Manufacturer=N.A., Part number NEMS=100200469, Artikkelnr Noca=N.A., Author=getr, Component Class=Capacitors, Component Status=Active, ComponentLink1Description=Datasheet, ComponentLink1URL=N.A., ComponentLink2Description="Supplier link", ComponentLink2URL=N.A., Footprint Doc=0201, HelpURL=N.A., LatestRevisionDate=2021-04-12, Manufacturer Part Number=N.A., Note=10V, Pad Count=2, Part Number=C0201-100n-10V-X7R, Part number IPS=N.A., Part number Norautron=N.A., PartId=100200469, Published=2021-04-12, Supplier 1=N.A., Supplier 2=N.A., Supplier Part Number 1=N.A., Supplier Part Number 2=N.A.
C12 C46 C47: "Capacitor 22uF 0402", Manufacturer_Name="Murata Electronics", Mouser Part Number=81-GRM158R61A226ME5D, Arrow Part Number=GRM158R61A226ME15D, Arrow Price/Stock=https://www.arrow.com/en/products/grm158r61a226me15d/murata-manufacturing?utm_currency=USD&region=nac, Datasheet Link=https://search.murata.co.jp/Ceramy/image/img/A01X/G101/ENG/GRM158R61A226ME15-01A.pdf, Height=0.33mm, Manufacturer_Part_Number=GRM158R61A226ME15D, Mouser Price/Stock=https://www.mouser.co.uk/ProductDetail/Murata-Electronics/GRM158R61A226ME15D?qs=hd1VzrDQEGg0KAVI30ga2w%3D%3D
C13: "Capacitor 100uF", Manufacturer_Name=SAMSUNG, Mouser Part Number=187-CL21A107MQYNNWE, Arrow Part Number=CL21A107MQYNNWE, Arrow Price/Stock=https://www.arrow.com/en/products/cl21a107mqynnwe/samsung-electro-mechanics?utm_currency=USD&region=nac, Datasheet Link=https://www.mouser.jp/datasheet/2/585/Samsung_7_14_2022_CL21A107MQYNNW_Specsheet-3000071.pdf, Height=1.45mm, Manufacturer_Part_Number=CL21A107MQYNNWE, Mouser Price/Stock=https://www.mouser.co.uk/ProductDetail/Samsung-Electro-Mechanics/CL21A107MQYNNWE?qs=81r%252BiQLm7BSNi6fWCnDBNQ%3D%3D
C21: "Description", Manufacturer_Name="Johanson Technology", Copyright="Copyright (C) 2025 Ultra Librarian. All rights reserved.", Manufacturer_Part_Number=500R07S1R2BV4T
C22 C28: library part C0201-2µ2-2.5V-X6T-GRM033D80E225ME47D, "Capacitor, Ceramic, 2.2µF 2.5V X6T 0201,±20%", Manufacturer=Murata, Manufacturer Part Number=GRM033R61A225KE47, Part number IPS=N.A., Part number NEMS=100200527, Supplier Part Number 1=81-GRM033D80E225ME7D, Artikkelnr Noca=N.A., Author=stl1, Component Class=Capacitors, Component Status=Active, ComponentLink1Description=Datasheet, ComponentLink1URL=https://www.murata.com/products/productdetail?partno=GRM033D80E225ME47%23, ComponentLink2Description="Supplier link", ComponentLink2URL=N.A., HelpURL=N.A., LatestRevisionDate=2022-02-27, Note="2.5V, 20%, X6T", Pad Count=2, Part Number=C0201-2µ2-2.5V-X6T-GRM033D80E225ME47D, Part number Norautron=N.A., PartId=100200527, Published=2022-02-27, Supplier 1=Mouser, Supplier 2=Digi-Key, Supplier Part Number 2=490-18653-1-ND
C23: library part C0201-1.5p-25V-NP0-GJM0335C1E1R5WB01, "Capacitor, 1.5pF, NP0, ±0.05pF, 25V, High Q", Manufacturer=Murata, Part number IPS=N.A., Part number NEMS=100200477, Supplier Part Number 1=490-11176-2-ND, Artikkelnr Noca=N.A., Author=masi, Component Class=Capacitors, Component Status=Active, ComponentLink1Description=Datasheet, ComponentLink1URL=https://search.murata.co.jp/Ceramy/image/img/A01X/G101/ENG/GJM0335C1E1R5WB01-01.pdf, ComponentLink2Description="Supplier link", ComponentLink2URL=N.A., Footprint Doc=0201, HelpURL=https://www.murata.com/products/productdetail?partno=GJM0335C1E1R5WB01%23, LatestRevisionDate=2021-06-15, Manufacturer Part Number=GJM0335C1E1R5WB01, Note=25V, Pad Count=2, Part Number=C0201-1.5p-25V-NP0-GJM0335C1E1R5WB01, Part number Norautron=N.A., PartId=100200477, Published=2021-06-15, Supplier 1=Digi-Key, Supplier 2=Mouser, Supplier Part Number 2=81-GJM0335C1E1R5WB1D
C24: library part C0201-2.0p-HQ-Murata, "Capacitor, 2pF, NP0, ±0.05pF, 25V", Manufacturer=Murata, Part number IPS=00000001775, Part number NEMS=100200419, Part number Norautron=N.A., Artikkelnr Noca=N.A., Author=rsk, Component Class=Capacitors, Component Status=Active, ComponentLink1Description=Datasheet, ComponentLink1URL=N.A., ComponentLink2Description="Supplier link", ComponentLink2URL=N.A., Footprint Doc=0201, HelpURL=https://psearch.en.murata.com/capacitor/product/GJM0335C1E2R0WB01%23.html, LatestRevisionDate=2018-10-25, Manufacturer Part Number=GJM0335C1E2R0WB01, Note=25V, Pad Count=2, Part Number=C0201-2.0p-HQ-Murata, PartId=100200419, Published=2018-10-25, Supplier 1=N.A., Supplier 2=N.A., Supplier Part Number 1=N.A., Supplier Part Number 2=N.A.
C25: library part C0201-0.3p-50V-GRM0335C1HR30BA01, "Capacitor, C0G, ±0.1pF, 50V", Manufacturer=Murata, Manufacturer Part Number=GRM0335C1HR30BA01, Part number IPS=N.A., Part number NEMS=100200650, Supplier Part Number 1=490-6135-2-ND, Artikkelnr Noca=N.A., Author=masi, Component Class=Capacitors, Component Status=Active, ComponentLink1Description=Datasheet, ComponentLink1URL=https://www.murata.com/en-global/products/productdetail?partno=GRM0335C1HR30BA01%23, ComponentLink2Description="Supplier link", ComponentLink2URL=N.A., Footprint Doc=0201, HelpURL=N.A., LatestRevisionDate=2024-01-10, Note=50V, Pad Count=2, Part Number=C0201-0.3p-50V-GRM0335C1HR30BA01, Part number Norautron=N.A., PartId=100200650, Published=2024-01-10, Supplier 1=Digi-Key, Supplier 2=Mouser, Supplier Part Number 2=81-GRM0335C1HR30BA1D
C26: "Capacitor 1nF", Manufacturer_Name="Murata Electronics", Mouser Part Number=81-GRM0335C1H102GE1D, Datasheet Link=https://search.murata.co.jp/Ceramy/image/img/A01X/G101/ENG/GRM0335C1H102GE01-01A.pdf, Height=0.33mm, Manufacturer_Part_Number=GRM0335C1H102GE01D, Mouser Price/Stock=https://www.mouser.co.uk/ProductDetail/Murata-Electronics/GRM0335C1H102GE01D?qs=DPoM0jnrROXb%252BXi%252BdiEYKA%3D%3D
C29: library part C0201-10n-6.3V-X7R, "Capacitor, 10nF", Manufacturer=Murata, Part number IPS=N.A., Part number NEMS=100200407, Supplier Part Number 1=490-1262-1-ND, Artikkelnr Noca=N.A., Author=rsk, Component Class=Capacitors, Component Status=Active, ComponentLink1Description=Datasheet, ComponentLink1URL=http://search.murata.co.jp/Ceramy/image/img/A01X/G101/ENG/GRM033R70J103KA01-01.pdf, ComponentLink2Description="Supplier link", ComponentLink2URL=N.A., HelpURL=N.A., LatestRevisionDate=2020-10-13, Manufacturer Part Number=GRM033R70J103KA01D, Note=6.3V, Pad Count=2, Part Number=C0201-10n-6.3V-X7R, Part number Norautron=N.A., PartId=100200407, Published=2018-05-07, Supplier 1=Digi-Key, Supplier 2=N.A., Supplier Part Number 2=N.A.
C30: library part C0201-2n2, "Capacitor, X7R, ±10%, 10V 2.2nF", Manufacturer=N.A., Part number IPS=00000001778, Part number NEMS=100200060, Part number Norautron=26470002, Artikkelnr Noca=N.A., Author=rsk, Component Class=Capacitors, Component Status=Active, ComponentLink1Description=Datasheet, ComponentLink1URL=N.A., ComponentLink2Description="Supplier link", ComponentLink2URL=N.A., HelpURL=N.A., LatestRevisionDate=2014-11-13, Manufacturer Part Number=N.A., Note=10V, Pad Count=2, Part Number=C0201-2n2, PartId=100200060, Published=2014-11-13, Supplier 1=N.A., Supplier 2=N.A., Supplier Part Number 1=N.A., Supplier Part Number 2=N.A.
C31: library part C0201-3.9p, "Chip Cap 0201", Manufacturer=N.A., Part number NEMS=100200024, Artikkelnr Noca=N.A., Author=rsk, Component Class=Capacitors, Component Status=Active, ComponentLink1Description=Datasheet, ComponentLink1URL=N.A., ComponentLink2Description="Supplier link", ComponentLink2URL=N.A., HelpURL=N.A., LatestRevisionDate=2014-11-13, Manufacturer Part Number=N.A., Note="Chip Cap 1%", Pad Count=2, Part Number=C0201-3.9p, Part number IPS=N.A., Part number Norautron=N.A., PartId=100200024, Published=2014-11-13, Supplier 1=N.A., Supplier 2=N.A., Supplier Part Number 1=N.A., Supplier Part Number 2=N.A.
C36 C37 C38 C39 C40 C41: "Capacitor 220pF", Manufacturer_Name="Murata Electronics", Mouser Part Number=81-GRM0335C1H221FA1D, Datasheet Link=https://search.murata.co.jp/Ceramy/image/img/A01X/G101/ENG/GRM0335C1H221FA01-01A.pdf, Height=0.33mm, Manufacturer_Part_Number=GRM0335C1H221FA01D, Mouser Price/Stock=https://www.mouser.co.uk/ProductDetail/Murata-Electronics/GRM0335C1H221FA01D/?qs=rrS6PyfT74d6B87t4Yhwdg%3D%3D
D1: "Diode ESD (Bi-directional)", Manufacturer_Name=STMicroelectronics, Mouser Part Number=511-ESDALC8-1BF4, Arrow Part Number=ESDALC8-1BF4, Arrow Price/Stock=https://www.arrow.com/en/products/esdalc8-1bf4/stmicroelectronics, Datasheet Link=https://www.st.com/resource/en/datasheet/esdalc8-1bf4.pdf, Height=0.32mm, Manufacturer_Part_Number=ESDALC8-1BF4, Mouser Price/Stock=https://www.mouser.com/Search/Refine.aspx?Keyword=511-ESDALC8-1BF4
F1 F2: "Resettable Fuse", Manufacturer_Name=LITTELFUSE, Datasheet Link=https://g.componentsearchengine.com/Datasheets/1/0402L010SLKR.pdf, Height=0.6mm, Manufacturer_Part_Number=0402L050SL
FB1: library part FB0201-120R@100M-200mA-BLM03AG121SN1D, "Ferrite Bead, 120 Ohm @ 100MHz, 200mA, 500 mOhm Max", Manufacturer=Murata, Manufacturer Part Number=BLM03AG121SN1D, Part number IPS=N.A., Part number NEMS=100300419, Supplier Part Number 1=490-5622-1-ND, Artikkelnr Noca=N.A., Author=stl1, Component Class=Inductors, Component Status=Active, ComponentLink1Description=Datasheet, ComponentLink1URL=https://www.murata.com/en-eu/products/productdetail?partno=BLM03AG121SN1%23, ComponentLink2Description="Supplier link", ComponentLink2URL=N.A., HelpURL=N.A., LatestRevisionDate=2022-02-27, Note="Ferrite Bead", Pad Count=2, Part Number=FB0201-120R@100M-200mA-BLM03AG121SN1D, Part number Norautron=N.A., PartId=100300419, Published=2022-02-27, Supplier 1=Digi-Key, Supplier 2=Mouser, Supplier Part Number 2=81-BLM03AX121SN1D
IC1: "Integrated Circuit", Manufacturer_Name="Texas Instruments", Mouser Part Number=595-ADS1299IPAG, Arrow Part Number=ADS1299IPAG, Arrow Price/Stock=https://www.arrow.com/en/products/ads1299ipag/texas-instruments?utm_currency=USD&region=nac, Datasheet Link=http://www.ti.com/general/docs/lit/getliterature.tsp?genericPartNumber=ADS1299&&fileType=pdf, Height=1.2mm, Manufacturer_Part_Number=ADS1299IPAG, Mouser Price/Stock=https://www.mouser.co.uk/ProductDetail/Texas-Instruments/ADS1299IPAG?qs=g9Q%2FF7kJgMyNB%2Fl7Pgr%252B%252BA%3D%3D
IC2: "Integrated Circuit", Manufacturer_Name="Nordic Semiconductor", Mouser Part Number=949-NPM1100-QDAA-R7, Arrow Part Number=NPM1100-QDAA-R7, Arrow Price/Stock=https://www.arrow.com/en/products/npm1100-qdaa-r7/nordic-semiconductor?utm_currency=USD&region=nac, Datasheet Link=https://www.digikey.co.za/en/products/detail/nordic-semiconductor-asa/NPM1100-QDAA-R7/18069439?s=N4IgTCBcDaIHIAUCyBGFAGdBaAigEQEECsAlAdhAF0BfIA, Height=0.9mm, Manufacturer_Part_Number=NPM1100-QDAA-R7, Mouser Price/Stock=https://www.mouser.co.uk/ProductDetail/Nordic-Semiconductor/NPM1100-QDAA-R7?qs=amGC7iS6iy8FBZdylLqz2Q%3D%3D
IC3: "Integrated Circuit", Manufacturer_Name="Texas Instruments", Mouser Part Number=595-TPD4E1B06DRLR, Arrow Part Number=TPD4E1B06DRLR, Arrow Price/Stock=https://www.arrow.com/en/products/tpd4e1b06drlr/texas-instruments?utm_currency=USD&region=nac, Datasheet Link=http://www.ti.com/lit/ds/symlink/tpd4e1b06.pdf, Height=0.6mm, Manufacturer_Part_Number=TPD4E1B06DRLR, Mouser Price/Stock=https://www.mouser.co.uk/ProductDetail/Texas-Instruments/TPD4E1B06DRLR?qs=1MXlzafEN387aRSX0e2MEQ%3D%3D
IC4: "Integrated Circuit", Manufacturer_Name="Texas Instruments", Mouser Part Number=595-TPS61023DRLR, Arrow Part Number=TPS61023DRLR, Arrow Price/Stock=https://www.arrow.com/en/products/tps61023drlr/texas-instruments?utm_currency=USD&region=nac, Datasheet Link=http://www.ti.com/lit/ds/symlink/tps61023.pdf, Height=0.6mm, Manufacturer_Part_Number=TPS61023DRLR, Mouser Price/Stock=https://www.mouser.co.uk/ProductDetail/Texas-Instruments/TPS61023DRLR?qs=BJlw7L4Cy7%2FfEnwYuWeGOg%3D%3D
J1: "Connector", Manufacturer_Name="JST (JAPAN SOLDERLESS TERMINALS)", Manufacturer_Part_Number=10FHH-SM1-GAN-TF(LF)(SN), Datasheet Link=https://www.jst.com/wp-content/uploads/2021/03/eFHH.pdf, Height=2mm
J2: "Connector", Manufacturer_Name="Tag Connect", Datasheet Link=https://datasheet.datasheetarchive.com/originals/distributors/Datasheets_SAMA/eee374929cd7518d6d3464b8148cd1bf.pdf, Height=18.669mm, Manufacturer_Part_Number=TC2030-MCP
J3: "Connector", Manufacturer_Name="G-Switch Electronic", Datasheet Link=https://www.dg-switch.com/uploads/soft/231230/GT-USB-7055BB.pdf, Height=6.6mm, Manufacturer_Part_Number=GT-USB-7055BB
J4: "Connector", Arrow Part Number=S2B-PH-SM4-TB(LF)(SN), Manufacturer_Name="JST (JAPAN SOLDERLESS TERMINALS)", Mouser Part Number=N/A, Arrow Price/Stock=https://www.arrow.com/en/products/s2b-ph-sm4-tb-lf-sn/jst-manufacturing?utm_currency=USD&region=europe, Datasheet Link=https://www.jst-mfg.com/product/pdf/eng/ePH.pdf, Height=6.6mm, Manufacturer_Part_Number=S2B-PH-SM4-TB(LF)(SN), Mouser Price/Stock=https://www.mouser.co.uk/ProductDetail/JST-Commercial/S2B-PH-SM4-TBLFSN?qs=QpmGXVUTftEA9IU90i0xlg%3D%3D
L1: "Inductor", Manufacturer_Name="TAIYO YUDEN", Mouser Part Number=963-MBKK1608T2R2M, Arrow Part Number=MBKK1608T2R2M, Arrow Price/Stock=https://www.arrow.com/en/products/mbkk1608t2r2m/taiyo-yuden?region=nac, Datasheet Link=https://ds.yuden.co.jp/TYCOMPAS/ut/detail?pn=MBKK1608T2R2M%20%20&u=M, Height=1mm, Manufacturer_Part_Number=MBKK1608T2R2M, Mouser Price/Stock=https://www.mouser.co.uk/ProductDetail/TAIYO-YUDEN/MBKK1608T2R2M?qs=DdDyqbI1VsjL85dwAH0aww%3D%3D
L2: library part L0603-4µ7-MLZ1608M4R7WT000, "Inductor, 120mA, ±20%, 0.65R", Manufacturer="TDK Corporation", Part number IPS=N.A., Part number NEMS=100300440, Supplier Part Number 1=445-6390-2-ND, Artikkelnr Noca=N.A., Author=stl1, Component Class=Inductors, Component Status=Active, ComponentLink1Description=Datasheet, ComponentLink1URL=https://product.tdk.com/en/search/inductor/inductor/smd/info?part_no=MLZ1608M4R7WT000, ComponentLink2Description="Supplier link", ComponentLink2URL=N.A., HelpURL=N.A., LatestRevisionDate=2023-05-10, Manufacturer Part Number=MLZ1608M4R7WT000, Note="Power Inductor ±20%", Pad Count=2, Part Number=L0603-4µ7-MLZ1608M4R7WT000, Part number Norautron=N.A., PartId=100300440, Published=2023-05-10, Supplier 1=Digi-Key, Supplier 2=Mouser, Supplier Part Number 2=810-MLZ1608M4R7WT000
L3: library part L0201-2n7-HQ-Murata, "Inductor, 2.7nH, 600mA, ±0.1ｎH, 120mOhm", Manufacturer=Murata, Part number IPS=00000001753, Part number NEMS=100300214, Part number Norautron=N.A., Supplier Part Number 1=490-13909-1-ND, Artikkelnr Noca=N.A., Author=rsk, Component Class=Inductors, Component Status=Active, ComponentLink1Description=Datasheet, ComponentLink1URL=https://search.murata.co.jp/Ceramy/image/img/P02/JELF243C-0021.pdf, ComponentLink2Description="Supplier link", ComponentLink2URL=N.A., HelpURL=https://psearch.en.murata.com/inductor/product/LQP03HQ2N7B02%23.html, LatestRevisionDate=2018-10-23, Manufacturer Part Number=LQP03HQ2N7B02, Note="-55°C ~ 125°C", Pad Count=2, Part Number=L0201-2n7-HQ-Murata, PartId=100300214, Published=2018-10-23, Supplier 1=Digi-Key, Supplier 2=N.A., Supplier Part Number 2=N.A.
L4 L5: library part L0201-3n5-HQ-Murata, "Inductor, 3.5nH, 500mA, ±0.1ｎH, 170mOhm", Manufacturer=Murata, Part number IPS=N.A., Part number NEMS=100300222, Supplier Part Number 1=490-13925-1-ND, Artikkelnr Noca=N.A., Author=rsk, Component Class=Inductors, Component Status=Active, ComponentLink1Description=Datasheet, ComponentLink1URL=https://search.murata.co.jp/Ceramy/image/img/P02/JELF243C-0021.pdf, ComponentLink2Description="Supplier link", ComponentLink2URL=N.A., HelpURL=https://psearch.en.murata.com/inductor/product/LQP03HQ3N5B02%23.html, LatestRevisionDate=2018-10-23, Manufacturer Part Number=LQP03HQ3N5B02, Note="-55°C ~ 125°C", Pad Count=2, Part Number=L0201-3n5-HQ-Murata, Part number Norautron=N.A., PartId=100300222, Published=2018-10-23, Supplier 1=Digi-Key, Supplier 2=N.A., Supplier Part Number 2=N.A.
L6 L7: library part LRC0402CS3N3GV001T, "Inductor", Manufacturer_Name="JOHANSON TECHNOLOGY", Datasheet Link=https://www.johansontechnology.com/docs/4510/ceramic-inductors-datasheet.pdf, Height=0.6mm, Manufacturer_Part_Number=LRC0402CS3N3GV001T
L8: "Inductor", Manufacturer_Name="Murata Electronics", Mouser Part Number=81-DFE18SAN1R0MG0L, Arrow Part Number=DFE18SAN1R0MG0L, Arrow Price/Stock=https://www.arrow.com/en/products/dfe18san1r0mg0l/murata-manufacturing?region=nac, Datasheet Link=https://search.murata.co.jp/Ceramy/image/img/P02/JETE243A-0036.pdf, Height=1mm, Manufacturer_Part_Number=DFE18SAN1R0MG0L, Mouser Price/Stock=https://www.mouser.co.uk/ProductDetail/Murata-Electronics/DFE18SAN1R0MG0L?qs=EU6FO9ffTwdBzqsLsYlEDA%3D%3D
LED1: "LED", Manufacturer_Name=Kingbright, Mouser Part Number=604-APG0603SECETT, Arrow Part Number=APG0603SEC-E-TT, Arrow Price/Stock=https://www.arrow.com/en/products/apg0603sec-e-tt/kingbright?region=nac, Datasheet Link=https://www.digikey.ph/en/products/detail/kingbright/APG0603SEC-E-TT/6072767, Height=0.2mm, Manufacturer_Part_Number=APG0603SEC-E-TT, Mouser Price/Stock=https://www.mouser.co.uk/ProductDetail/Kingbright/APG0603SEC-E-TT?qs=cRhdKgsiOJrYr%252BYSvKe71Q%3D%3D
Q1: "MOSFET (N-Channel)", Manufacturer_Name="Diodes Incorporated", Mouser Part Number=621-DMN31D5UFZ-7B, Datasheet Link=https://www.diodes.com//assets/Datasheets/DMN31D5UFZ.pdf, Manufacturer_Part_Number=DMN31D5UFZ-7B, Mouser Price/Stock=https://www.mouser.co.uk/ProductDetail/Diodes-Incorporated/DMN31D5UFZ-7B?qs=IvkZ4pJZlB3BAtMzN9vISA%3D%3D
R1 R3 R4 R7 R8 R9 R10 R12 R13 R14 R16 R20 R21 R22 R24 R25 R26 R27 R29: "Resistor 10k", Manufacturer_Name=Panasonic, Datasheet Link=http://industrial.panasonic.com/cdbs/www-data/pdf/RDM0000/AOA0000C307.pdf, Height=0.26mm, Manufacturer_Part_Number=ERA1AEB103C
R2: "Resistor 1.8k", Manufacturer_Name="Yageo Group", Mouser Part Number=603-RC0201FR-071K8L, Arrow Part Number=RC0201FR-071K8L, Arrow Price/Stock=https://www.arrow.com/en/products/rc0201fr-071k8l/yageo?region=nac, Datasheet Link=http://www.yageo.com/documents/recent/PYu-RC0201_51_RoHS_L_8.pdf, Height=0.26mm, Manufacturer_Part_Number=RC0201FR-071K8L, Mouser Price/Stock=https://www.mouser.com/Search/Refine.aspx?Keyword=603-RC0201FR-071K8L
R5 R11 R15 R19: library part ERA-1AEB101C, "Resistor 1M", Manufacturer_Name=Panasonic, Mouser Part Number=667-ERA-1AEB101C, Arrow Part Number=ERA-1AEB101C, Arrow Price/Stock=https://www.arrow.com/en/products/era-1aeb101c/panasonic?region=nac, Datasheet Link=http://industrial.panasonic.com/cdbs/www-data/pdf/RDM0000/AOA0000C307.pdf, Height=0.26mm, Manufacturer_Part_Number=ERA-1AEB101C, Mouser Price/Stock=https://www.mouser.co.uk/ProductDetail/Panasonic/ERA-1AEB101C?qs=6%252Bc%252B2ke79U4NC8Nf%252Bq1i6A%3D%3D
R6: library part R0201-1k0, "Resistor 1.8k", Manufacturer=N.A., Part number IPS=00000005786, Part number NEMS=100100043, Artikkelnr Noca=N.A., Author=rsk, Component Class=Resistors, Component Status=Active, ComponentLink1Description=Datasheet, ComponentLink1URL=N.A., ComponentLink2Description="Supplier link", ComponentLink2URL=N.A., HelpURL=N.A., LatestRevisionDate=2014-11-13, Manufacturer Part Number=N.A., Note="Chip Res 1%", Pad Count=2, Part Number=R0201-1k0, Part number Norautron=N.A., PartId=100100043, Published=2014-11-13, Supplier 1=N.A., Supplier 2=N.A., Supplier Part Number 1=N.A., Supplier Part Number 2=N.A.
R17 R18: "Resistor 5.1k", Manufacturer_Name="Yageo Group", Mouser Part Number=603-RC0201JR-075K1L, Datasheet Link=http://www.yageo.com/documents/recent/PYu-RC0201_51_RoHS_L_8.pdf, Height=0.26mm, Manufacturer_Part_Number=RC0201JR-075K1L, Mouser Price/Stock=https://www.mouser.com/Search/Refine.aspx?Keyword=603-RC0201JR-075K1L
R23: "Resistor", Manufacturer_Name="Yageo Group", Arrow Part Number=RC0201JR-07680RL, Arrow Price/Stock=https://www.arrow.com/en/products/rc0201jr-07680rl/yageo, Datasheet Link=http://www.yageo.com/documents/recent/PYu-RC0201_51_RoHS_L_8.pdf, Height=0.26mm, Manufacturer_Part_Number=RC0201JR-07680RL
R28: library part RC0201FR-0773K2L, "AC0201FR-0776K8L 76.8k", Manufacturer_Name="Yageo Group", Arrow Part Number=RC0201FR-0773K2L, Arrow Price/Stock=https://www.arrow.com/en/products/rc0201fr-0773k2l/yageo?region=nac, Datasheet Link=http://www.yageo.com/documents/recent/PYu-RC0201_51_RoHS_L_8.pdf, Height=0.26mm, Manufacturer_Part_Number=RC0201FR-0773K2L
S1: "Switch", Manufacturer_Name="G-Switch Electronic", Datasheet Link=https://www.dg-switch.com/uploads/soft/200615/%E5%93%81%E8%B5%9EMK-11C04-G013.pdf?fbclid=IwZXh0bgNhZW0CMTEAAR0AJCzNXSbXm6tv7QD29iqmkU7HUOTzQEjSSoqvyCwOAtUnKQu-KuAmiDE_aem_1ELsU2yAje-H6Aq4_4J2tg, Height=0.9mm, Manufacturer_Part_Number=MK-11C04-G013
U1: library part nRF54L15-QFAAC00, "Multi-protocol Bluetooth Low Energy, IEEE 802.15.4 and 2.4GHz proprietary Wireless MCU", Manufacturer="Nordic Semiconductor", Part number IPS=N.A., Part number NEMS=102000382, Artikkelnr Noca=N.A., Author=stl1, Component Class=Nordic_Devices, Component Status=Active, ComponentLink1Description=Datasheet, ComponentLink1URL=N.A., ComponentLink2Description="Supplier link", ComponentLink2URL=N.A., Footprint Doc=QFN-48, HelpURL=N.A., LatestRevisionDate=2025-01-30, Manufacturer Part Number=nRF54L15-QFAAC00, Note=N.A., Pad Count=49, Part Number=nRF54L15-QFAAC00, Part number Norautron=N.A., PartId=102000382, Published=2025-01-30, Supplier 1="Nordic Semiconductor", Supplier 2=N.A., Supplier Part Number 1=nRF54L15-QFAAC00, Supplier Part Number 2=N.A.
U2: library part CMP-12175-000006-1, "ACCEL 2-16G I2C/SPI 12LGA", Manufacturer=STMicroelectronics, Max Supply Voltage=3.6V, Min Supply Voltage=1.62V, Operating Supply Current=0.38-90uA, Package=LGA12-DM00170568, Temperature="-40°C to +85°C", Temperature Range High=+85°C, Temperature Range Low=-40°C, Accel Range=2/4/8/16g, Accel Resolution=14bits, Automotive=No, Category=IC, ComponentLink2Description=Datasheet, ComponentLink2URL=https://www.st.com/resource/en/datasheet/lis2dw12.pdf, Device Class L1=Sensors, Device Class L2="Motion Sensors", Device Class L3=Accelerometers, Digikey Description="ACCEL 2-16G I2C/SPI 12LGA", Footprint Url=https://www.st.com/content/ccc/resource/technical/document/technical_note/73/17/9c/16/dd/96/4a/01/CD00134799.pdf/files/CD00134799.pdf/jcr:content/translations/en.CD00134799.pdf, Height=0.7mm, Lead Free=Yes, Manufacturer Part Number=LIS2DW12TR, Mouser Description="Accelerometer Triple ±2g/±4g/±8g/±16g 1.62V to 3.6V 0.244mg/digit/0.488mg/digit/0.976mg/digit/1.952mg/digit 12-Pin LG...", Octopart=https://octopart.com/lis2dw12tr-stmicroelectronics-77080925, RoHS=TRUE, Sensor Output=I2C,SPI
U3: library part NCP163AMX180TBG, Manufacturer_Name=onsemi, Copyright="Copyright (C) 2025 Ultra Librarian. All rights reserved.", Manufacturer_Part_Number=NCP163AMX180TBG, RefDes=RefDes, Type=Type
Y1: "Crystal or Oscillator", Manufacturer_Name=ECS, Mouser Part Number=520-320-8-37B2-CTNTR, Datasheet Link=https://ecsxtal.com/store/pdf/ECX-1637B2.pdf, Height=0.5mm, Manufacturer_Part_Number=ECS-320-8-37B2-CTN-TR, Mouser Price/Stock=https://www.mouser.co.uk/ProductDetail/ECS/ECS-320-8-37B2-CTN-TR?qs=aP1CjGhiNiHdeKDzQVYpfg%3D%3D

## Free pads (board coordinates)
  round 1.5 hole 1.1 unplated mask-2539.97: 24(151.638,49.352) 24(167.996,55.397)
  round 1.5 hole 1.1 unplated: 24(162.624,39.713)

## Via types
v1: diameter 0.25, hole 0.15, Top Layer to Bottom Layer, 295 vias
v2: diameter 0.5, hole 0.25, Top Layer to Bottom Layer, 41 vias
v3: diameter 0.66, hole 0.33, Top Layer to Bottom Layer, 19 vias